# EAGLE board pcb (EAGLE 9.7.0)
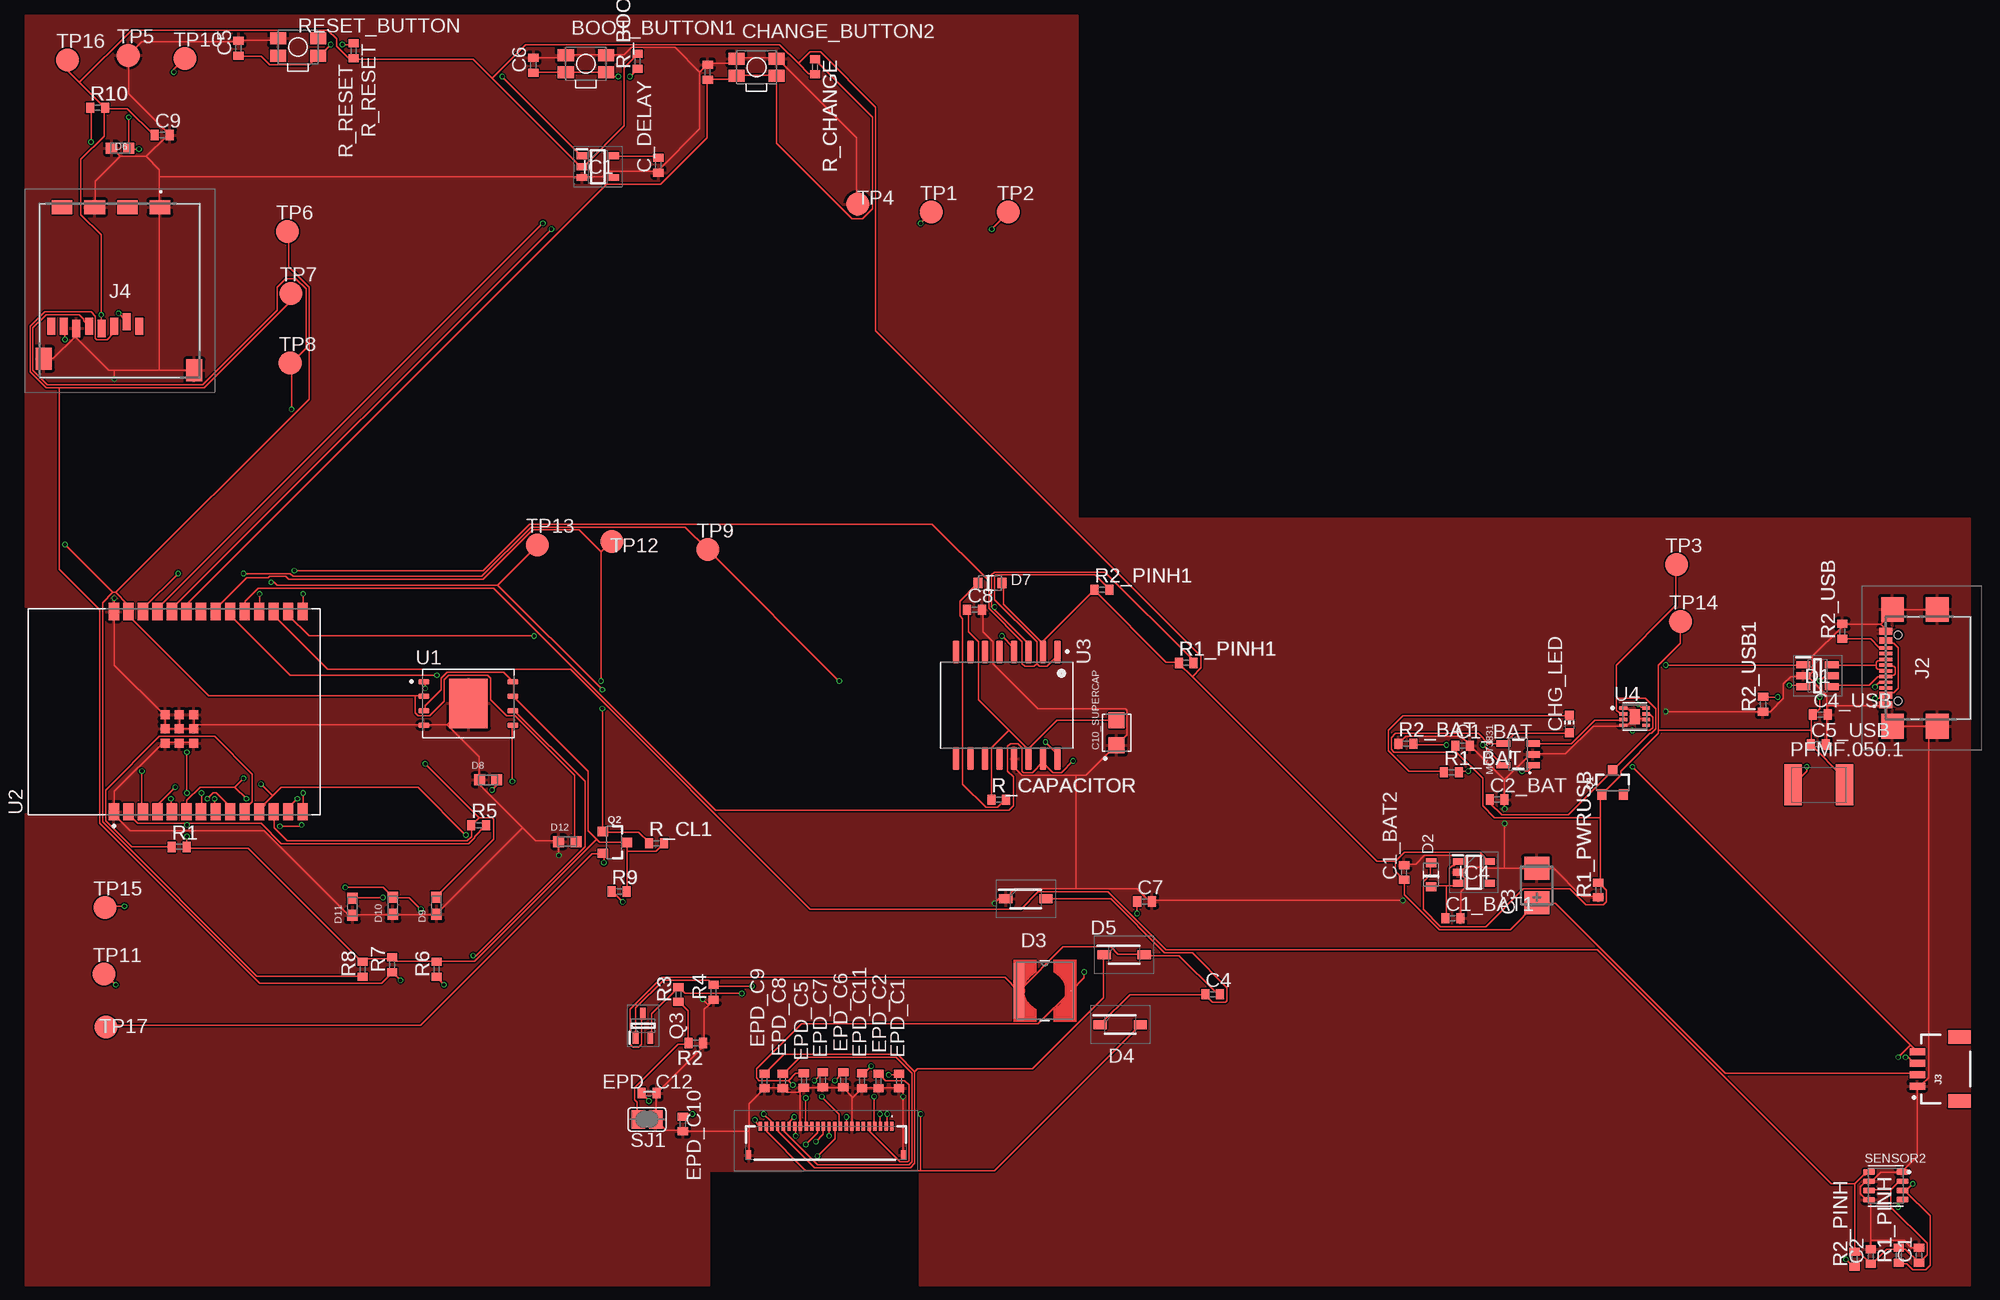
[diagram p0: board, top side]
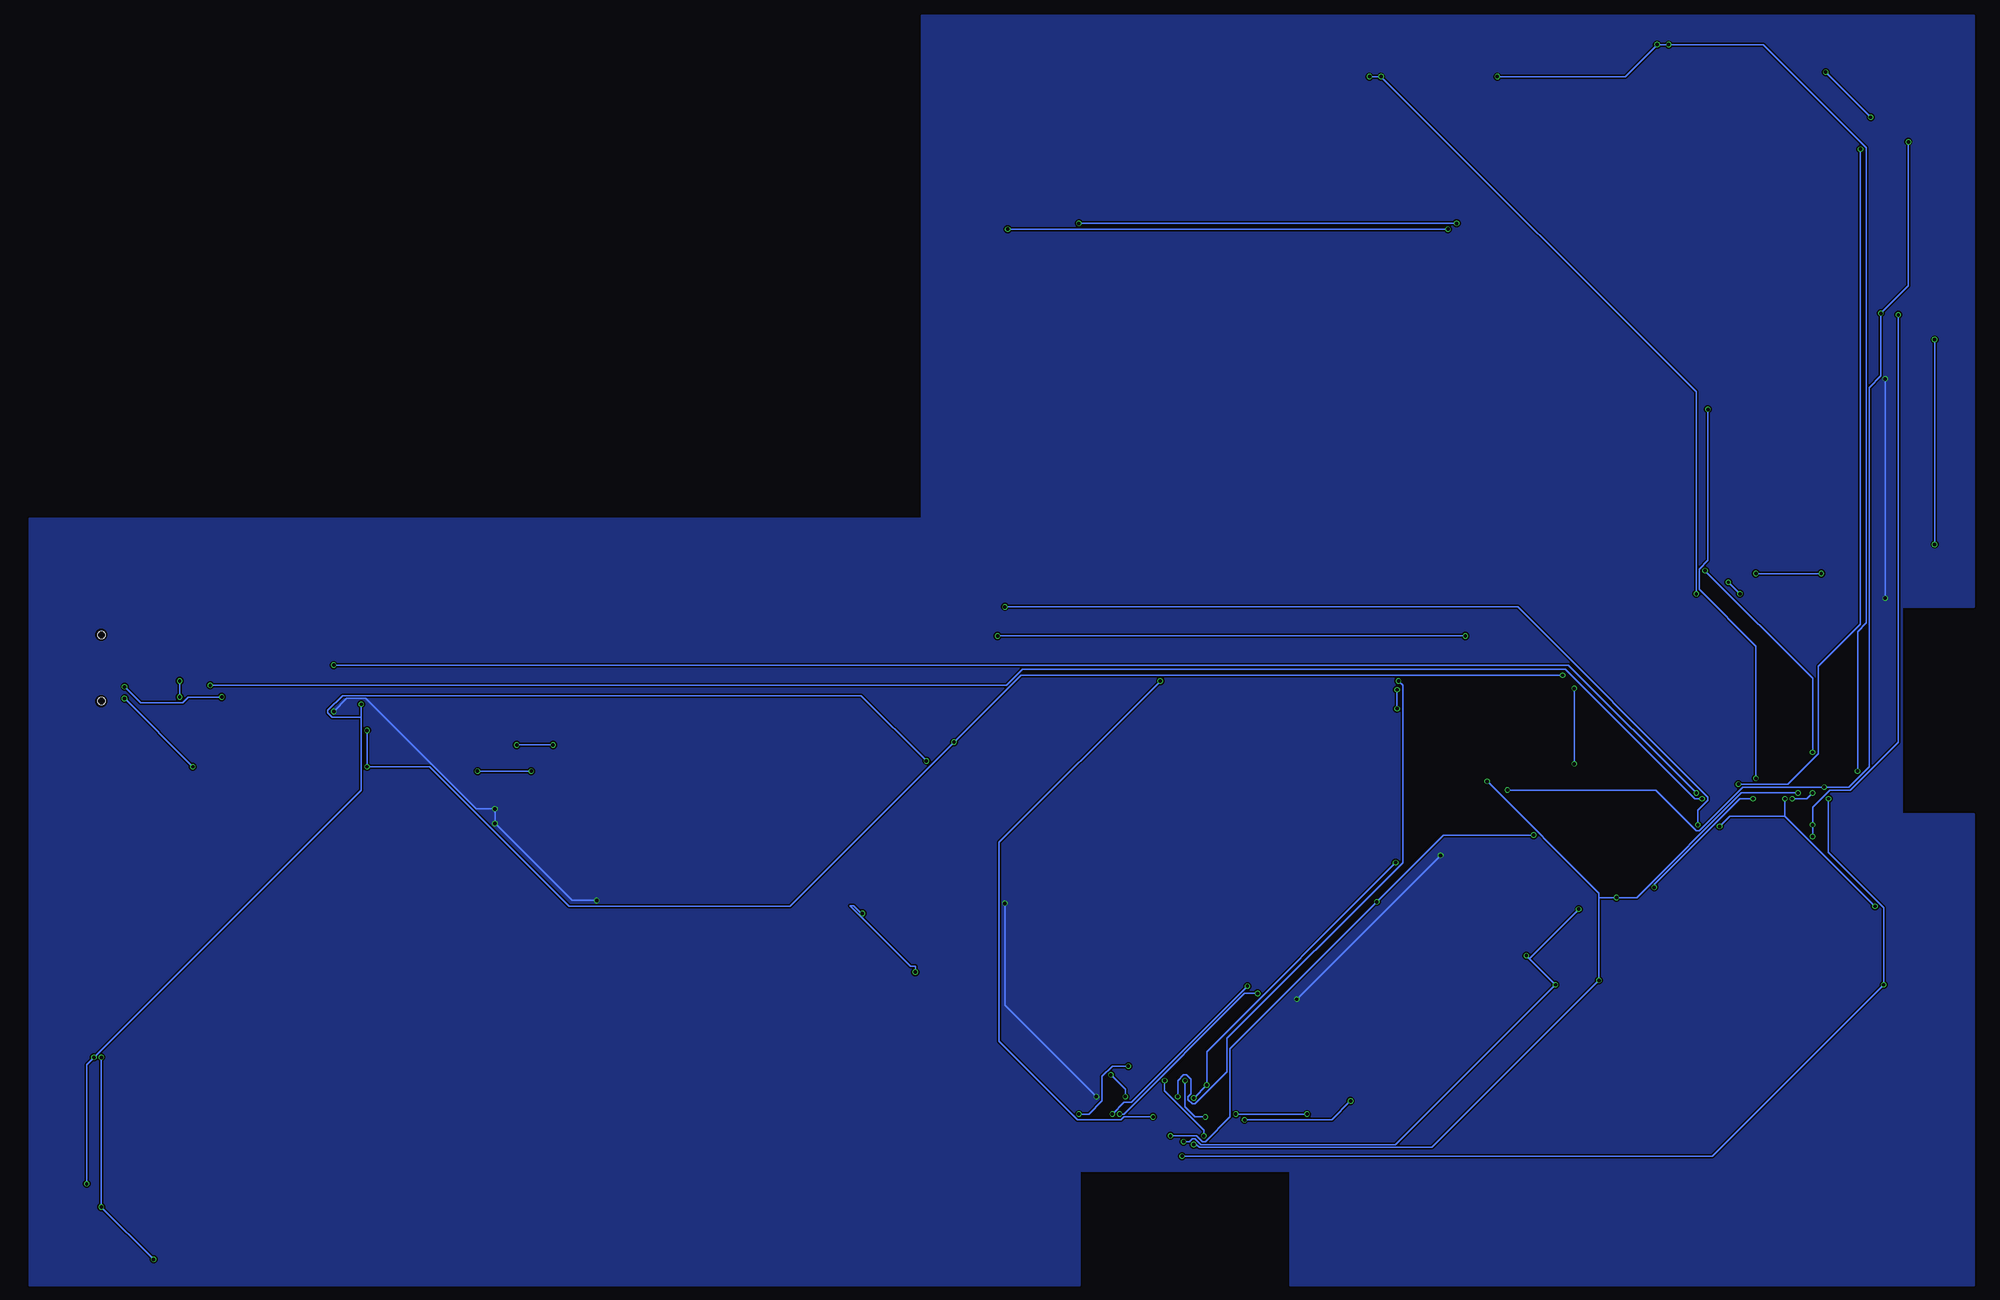
[diagram p1: board, bottom side, seen from below]

No outline drawn. Coordinates in mm, seen from the top.
Copper layers (1*16): Top 0.035mm / dielectric 1.6mm / Bottom 0.035mm
Design rules "jlcpcb-2layers.dru": minimum track width 5mil, minimum drill 0.3mm, track to track 5mil, track to pad 5mil, pad to pad 5mil, via to via 5mil, smd to smd 5mil, copper to edge 0.2mm, drill to drill 6mil, minimum pad ring 10mil, minimum via ring 3mil, stop-mask expansion 4mil, vias tented up to drill 0mil, thermal gap 10mil

## Footprints (pad centres in the part's own frame; a part is rotated, then mirrored left to right if it is on the bottom)
MYBUTTON = smd 1.4 x 1.05: 1 1.75,0.75; 2 -1.75,0.75; 3 -1.75,-0.75; 4 1.75,-0.75
EAGLE-LTSPICE_C0402 = smd 0.7 x 0.9: 1 -0.65,0; 2 0.65,0
RCL_CT3528 = smd 2 x 2.2: + -1.5,0; - 1.5,0
CAPCP3225X100N = smd 1.4 x 1.4: 1 -1.1,0; 2 1.1,0
ADAFRUIT_CHIP-LED0603 = smd 0.8 x 0.8: A 0,-0.75; C 0,0.75
SOT95P280X145-6N = smd 1.2 x 0.6: 1 -1.25,0.95; 2 -1.25,0; 3 -1.25,-0.95; 4 1.25,-0.95; 5 1.25,0; 6 1.25,0.95
ESP32_WROVER_AVX---SD0805S020S1R0_AVX_SD0805S020S1R0_0 = smd 0.8 x 0.9: 1 -1.05,0; 2 1.05,0
SOD3716X135N = smd 1.15 x 0.8: 1 -1.75,0; 2 1.75,0
DIOC1608X36N = smd 0.97 x 0.94: 1 -0.75,0; 2 0.75,0
FH34SRJ24S05SH99 = smd 0.3 x 0.8: 1 5.75,1.45; 2 5.25,1.45; 3 4.75,1.45; 4 4.25,1.45; 5 3.75,1.45; 6 3.25,1.45; 7 2.75,1.45; 8 2.25,1.45; 9 1.75,1.45; 10 1.25,1.45; 11 0.75,1.45; 12 0.25,1.45; 13 -0.25,1.45; 14 -0.75,1.45; 15 -1.25,1.45; 16 -1.75,1.45; 17 -2.25,1.45; 18 -2.75,1.45; 19 -3.25,1.45; 20 -3.75,1.45; 21 -4.25,1.45; 22 -4.75,1.45; 23 -5.25,1.45; 24 -5.75,1.45 | smd 0.4 x 0.8: MP1 6.75,-1.05; MP2 -6.75,-1.05
SOT95P280X125-5N = smd 0.9 x 0.6: 1 -1.4,0.95; 2 -1.4,0; 3 -1.4,-0.95; 4 1.4,-0.95; 5 1.4,0.95
SOT95P280X120-5N = smd 0.9 x 0.6: 1 -1.4,0.95; 2 -1.4,0; 3 -1.4,-0.95; 4 1.4,-0.95; 5 1.4,0.95
SAMACSYS_PARTS_USB4110GFA = smd 0.3 x 1.15: A1 -3.35,3.678; A4 -2.55,3.678; A5 -1.25,3.678; A6 -0.25,3.678; A7 0.25,3.678; A8 1.25,3.678; A9 2.55,3.678; A12 3.35,3.678; B1 3.05,3.678; B4 2.25,3.678; B5 1.75,3.678; B6 0.75,3.678; B7 -0.75,3.678; B8 -1.75,3.678; B9 -2.25,3.678; B12 -3.05,3.678 | smd 2.18 x 2: MP1 -5.11,-0.827; MP2 5.11,-0.827; MP3 -5.11,3.103; MP4 5.11,3.103 | hole 0.65: -2.89,2.603; 2.89,2.603
JST04_1MM_RA = smd 0.6 x 1.35: 1 -1.5,0; 2 -0.5,0; 3 0.5,0; 4 1.5,0 | smd 1.2 x 2: NC1 2.8,-3.675; NC2 -2.8,-3.675
112ATAARR03ATTEND = smd 1.8 x 1.2: G1 10.6,10.4; G2 4.9,10.4; S1 7.75,10.4; S2 2.05,10.4 | smd 1.4 x 1.9: G3 13.6,-3.85; G4 0.45,-2.85 | smd 0.7 x 1.5: P1 8.8,0; P2 7.7,0.4; P3 6.6,0; P4 5.5,-0.2; P5 4.4,0; P6 3.3,-0.2; P7 2.2,0; P8 1.1,0
IND_4828-WE-TPC_WRE = smd 0.889 x 4.826: 1 -2.286,0 | smd 0.127 x 0.127: 2 2.286,0
ESP32_WROVER_SPARKFUN-IC-POWER_SOT23-5 = smd 0.55 x 1.2: 1 -0.95,-1.3; 2 0,-1.3; 3 0.95,-1.3; 4 0.95,1.3; 5 -0.95,1.3
ESP32C6_VARISTOR_CT/CN1812 = smd 1.5 x 3.6: 1 -2.25,0; 2 2.25,0
ESP32_WROVER_SPARKFUN-DISCRETESEMI_SOT23-3 = smd 0.8 x 0.9: 1 -0.95,-1; 2 0.95,-1; 3 0,1.1
SOT65P210X110-3N = smd 1.05 x 0.5: 1 -1.05,0.65; 2 -1.05,-0.65; 3 1.05,0
ESP32_WROVER_EAGLE-LTSPICE_R0402 = smd 0.7 x 0.9: 1 -0.65,0; 2 0.65,0
ESP32_WROVER_BME680_PSON80P300X300X100-8N = smd 1.016 x 0.5: 1 1.458,1.2; 2 1.458,0.4; 3 1.458,-0.4; 4 1.458,-1.2; 5 -1.458,-1.22; 6 -1.458,-0.4; 7 -1.458,0.4; 8 -1.458,1.2
SJ = smd 1.168 x 1.6: 1 -0.762,0; 2 0.762,0
TP20R = smd 2 x 2: TP 0,0
SON127P600X800X80-9N = smd 0.94 x 0.44: 1 -3.895,1.905; 2 -3.895,0.635; 3 -3.895,-0.635; 4 -3.895,-1.905; 5 3.895,-1.905; 6 3.895,-0.635; 7 3.895,0.635; 8 3.895,1.905 | smd 3.4 x 4.3: 9 0,0
XCVR_ESP32-C6-WROOM-1-N8 = smd 1.5 x 0.9: 1 -8.75,5.26; 2 -8.75,3.99; 3 -8.75,2.72; 4 -8.75,1.45; 5 -8.75,0.18; 6 -8.75,-1.09; 7 -8.75,-2.36; 8 -8.75,-3.63; 9 -8.75,-4.9; 10 -8.75,-6.17; 11 -8.75,-7.44; 12 -8.75,-8.71; 13 -8.75,-9.98; 14 -8.75,-11.25; 15 8.75,-11.25; 16 8.75,-9.98; 17 8.75,-8.71; 18 8.75,-7.44; 19 8.75,-6.17; 20 8.75,-4.9; 21 8.75,-3.63; 22 8.75,-2.36; 23 8.75,-1.09; 24 8.75,0.18; 25 8.75,1.45; 26 8.75,2.72; 27 8.75,3.99; 28 8.75,5.26 | smd 0.8 x 0.8: 29_1 -2.755,0.79; 29_2 -1.505,0.79; 29_3 -0.255,0.79; 29_4 -2.755,-0.46; 29_5 -1.505,-0.46; 29_6 -0.255,-0.46; 29_7 -2.755,-1.71; 29_8 -1.505,-1.71; 29_9 -0.255,-1.71
SOIC127P1032X265-16N = smd 2.05 x 0.59: 1 -4.655,4.445; 2 -4.655,3.175; 3 -4.655,1.905; 4 -4.655,0.635; 5 -4.655,-0.635; 6 -4.655,-1.905; 7 -4.655,-3.175; 8 -4.655,-4.445; 9 4.655,-4.445; 10 4.655,-3.175; 11 4.655,-1.905; 12 4.655,-0.635; 13 4.655,0.635; 14 4.655,1.905; 15 4.655,3.175; 16 4.655,4.445
SON50P200X200X80-9N = smd 0.76 x 0.27: 1 -0.985,0.75; 2 -0.985,0.25; 3 -0.985,-0.25; 4 -0.985,-0.75; 5 0.985,-0.75; 6 0.985,-0.25; 7 0.985,0.25; 8 0.985,0.75 | smd 0.9 x 1.3: 9 0,0

## Placement (x,y rotation side)
BOOT_BUTTON1  BUTTON_CUSYOMV1  [MYBUTTON]  49.1,83.67 0 top
C1  100nF  [EAGLE-LTSPICE_C0402]  165.65,-20.48 90 top
C1_BAT  4.7uF  [EAGLE-LTSPICE_C0402]  125.75,24.06 0 top
C1_BAT1  4.7uF  [EAGLE-LTSPICE_C0402]  124.89,8.98 0 top
C1_BAT2  4.7uF  [EAGLE-LTSPICE_C0402]  120.63,12.98 90 top
C2  100nF  [EAGLE-LTSPICE_C0402]  161.43,-20.58 90 top
C2_BAT  4.7uF  [EAGLE-LTSPICE_C0402]  128.76,19.36 0 top
C3  100uF TANT  [RCL_CT3528]  132.23,11.84 90 top
C4  4.7uF/25V  [EAGLE-LTSPICE_C0402]  103.9,2.34 0 top
C4_USB  100nF  [EAGLE-LTSPICE_C0402]  157.03,26.78 0 top
C5  1uF  [EAGLE-LTSPICE_C0402]  18.73,85.02 90 top
C5_USB  4.7uF  [EAGLE-LTSPICE_C0402]  156.84,24.18 0 top
C6  100nF  [EAGLE-LTSPICE_C0402]  44.51,83.54 90 top
C7  10uF  [EAGLE-LTSPICE_C0402]  97.95,10.44 0 top
C8  100nF  [EAGLE-LTSPICE_C0402]  83.09,35.94 0 top
C9  100nF  [EAGLE-LTSPICE_C0402]  12.07,77.44 0 top
C10  100nF  [EAGLE-LTSPICE_C0402]  59.75,82.94 90 top
C10_SUPERCAP  CPH3225A  [CAPCP3225X100N]  95.5,25.2 90 top
C_DELAY  100nF  [EAGLE-LTSPICE_C0402]  55.44,74.8 90 top
CHANGE_BUTTON2  BUTTON_CUSYOMV1  [MYBUTTON]  64.01,83.37 0 top
CHG_LED  [ADAFRUIT_CHIP-LED0603]  135.08,25.95 0 top
D1  USBLC6-2SC6Y  [SOT95P280X145-6N]  156.78,30.18 0 top
D2  ESP32_WROVER_AVX---SD0805S020S1R0_AVX_SD0805S020S1R0_0_0AVX_SD0805S020S1R0_0_0  [ESP32_WROVER_AVX---SD0805S020S1R0_AVX_SD0805S020S1R0_0]  122.99,12.79 90 top
D3  MBR0530  [SOD3716X135N]  87.56,10.68 0 top
D4  MBR0530  [SOD3716X135N]  95.82,-0.31 0 top
D5  MBR0530  [SOD3716X135N]  96.16,5.79 0 top
D6  PGB1010603MR  [DIOC1608X36N]  8.38,76.28 0 top
D7  ESP32_WROVER_AVX---SD0805S020S1R0_AVX_SD0805S020S1R0_0_0AVX_SD0805S020S1R0_0_0  [ESP32_WROVER_AVX---SD0805S020S1R0_AVX_SD0805S020S1R0_0]  84.44,38.29 0 top
D8  PGB1010603MR  [DIOC1608X36N]  40.56,21.08 0 top
D9  PGB1010603MR  [DIOC1608X36N]  36.04,10.08 90 top
D10  PGB1010603MR  [DIOC1608X36N]  32.22,10.08 90 top
D11  PGB1010603MR  [DIOC1608X36N]  28.7,9.98 90 top
D12  PGB1010603MR  [DIOC1608X36N]  47.48,15.68 0 top
EPD_C1  1uF/50V  [EAGLE-LTSPICE_C0402]  76.48,-5.24 90 top
EPD_C2  1uF/50V  [EAGLE-LTSPICE_C0402]  74.69,-5.24 90 top
EPD_C5  0.1uF/50V  [EAGLE-LTSPICE_C0402]  68.16,-5.2 90 top
EPD_C6  1uF/50V  [EAGLE-LTSPICE_C0402]  71.6,-5.14 90 top
EPD_C7  1uF/50V  [EAGLE-LTSPICE_C0402]  69.81,-5.14 90 top
EPD_C8  1uF/50V  [EAGLE-LTSPICE_C0402]  66.32,-5.24 90 top
EPD_C9  1uF/50V  [EAGLE-LTSPICE_C0402]  64.73,-5.24 90 top
EPD_C10  1uF/50V  [EAGLE-LTSPICE_C0402]  57.58,-9 90 top
EPD_C11  1uF/50V  [EAGLE-LTSPICE_C0402]  73.25,-5.22 90 top
EPD_C12  1uF/50V  [EAGLE-LTSPICE_C0402]  54.62,-6.3 180 top
FH34SRJ-24S-0.5SH_99_  FH34SRJ-24S-0.5SH_99_  [FH34SRJ24S05SH99]  70.11,-10.66 0 top
IC1  BD5229G-TR  [SOT95P280X125-5N]  50.15,74.68 0 top
IC4  XC6220A331MR-G  [SOT95P280X120-5N]  126.73,13 0 top
J2  SAMACSYS_PARTS_USB4110-GF-A  [SAMACSYS_PARTS_USB4110GFA]  166.43,30.86 90 top
J3  QWIIC_RIGHT_ANGLE  [JST04_1MM_RA]  165.51,-4.18 90 top
J4  112A-TAAR-R03_ATTEND  [112ATAARR03ATTEND]  1.27,60.73 0 top
L1  68uH  [IND_4828-WE-TPC_WRE]  89.23,2.65 0 top
MCP73831  ESP32_WROVER_SPARKFUN-IC-POWER_MCP73831  [ESP32_WROVER_SPARKFUN-IC-POWER_SOT23-5]  130.61,23.3 90 top
PFMF.050.1  ESP32C6_VARISTORCN1812  [ESP32C6_VARISTOR_CT/CN1812]  156.88,20.64 0 top
Q1  20V/4.2A/52mΩ/1.4W  [ESP32_WROVER_SPARKFUN-DISCRETESEMI_SOT23-3]  138.86,20.81 0 top
Q2  20V/4.2A/52mΩ/1.4W  [ESP32_WROVER_SPARKFUN-DISCRETESEMI_SOT23-3]  51.58,15.61 270 top
Q3  SI1308EDL-T1-GE3  [SOT65P210X110-3N]  54.09,-0.41 90 top
R1  10k  [ESP32_WROVER_EAGLE-LTSPICE_R0402]  13.55,15.22 0 top
R1_BAT  200  [ESP32_WROVER_EAGLE-LTSPICE_R0402]  124.78,21.74 0 top
R1_PINH  10k  [ESP32_WROVER_EAGLE-LTSPICE_R0402]  163.87,-20.48 90 top
R1_PINH1  10k  [ESP32_WROVER_EAGLE-LTSPICE_R0402]  101.58,31.3 0 top
R1_PWRUSB  100k  [ESP32_WROVER_EAGLE-LTSPICE_R0402]  137.6,11.45 90 top
R2  2.2  [ESP32_WROVER_EAGLE-LTSPICE_R0402]  58.71,-1.92 180 top
R2_BAT  2K  [ESP32_WROVER_EAGLE-LTSPICE_R0402]  120.79,24.24 0 top
R2_PINH  10k  [ESP32_WROVER_EAGLE-LTSPICE_R0402]  160.01,-20.82 90 top
R2_PINH1  10k  [ESP32_WROVER_EAGLE-LTSPICE_R0402]  94.22,37.7 0 top
R2_USB  5k1  [ESP32_WROVER_EAGLE-LTSPICE_R0402]  158.94,34.06 90 top
R2_USB1  5k1  [ESP32_WROVER_EAGLE-LTSPICE_R0402]  152.01,27.68 90 top
R3  0.47  [ESP32_WROVER_EAGLE-LTSPICE_R0402]  57.19,2.32 90 top
R4  10k  [ESP32_WROVER_EAGLE-LTSPICE_R0402]  60.27,2.52 90 top
R5  10K  [ESP32_WROVER_EAGLE-LTSPICE_R0402]  39.73,17.12 0 top
R6  10K  [ESP32_WROVER_EAGLE-LTSPICE_R0402]  36.05,4.52 90 top
R7  10K  [ESP32_WROVER_EAGLE-LTSPICE_R0402]  32.17,4.92 90 top
R8  10K  [ESP32_WROVER_EAGLE-LTSPICE_R0402]  29.59,4.52 90 top
R9  10K  [ESP32_WROVER_EAGLE-LTSPICE_R0402]  52.01,11.32 0 top
R10  10K  [ESP32_WROVER_EAGLE-LTSPICE_R0402]  6.41,79.82 0 top
R_BOOT  10K  [ESP32_WROVER_EAGLE-LTSPICE_R0402]  53.62,83.88 90 top
R_CAPACITOR  15  [ESP32_WROVER_EAGLE-LTSPICE_R0402]  85.2,19.35 0 top
R_CHANGE  10K  [ESP32_WROVER_EAGLE-LTSPICE_R0402]  69.14,83.4 270 top
R_CL1  10k  [ESP32_WROVER_EAGLE-LTSPICE_R0402]  55.27,15.54 0 top
R_RESET  10K  [ESP32_WROVER_EAGLE-LTSPICE_R0402]  28.8,84.8 270 top
RESET_BUTTON  BUTTON_CUSYOMV1  [MYBUTTON]  23.93,85.13 0 top
SENSOR2  ESP32_WROVER_BME680_BME680  [ESP32_WROVER_BME680_PSON80P300X300X100-8N]  162.74,-14.4 0 top
SJ1  [SJ]  54.44,-8.6 180 top
TP1  TPTP20R  [TP20R]  79.31,70.7 0 top
TP2  TPTP20R  [TP20R]  86.03,70.7 0 top
TP3  TPTP20R  [TP20R]  144.45,39.9 0 top
TP4  TPTP20R  [TP20R]  72.87,71.4 0 top
TP5  TPTP20R  [TP20R]  9.09,84.4 0 top
TP6  TPTP20R  [TP20R]  23.01,69 0 top
TP7  TPTP20R  [TP20R]  23.33,63.6 0 top
TP8  TPTP20R  [TP20R]  23.25,57.5 0 top
TP9  TPTP20R  [TP20R]  59.77,41.2 0 top
TP10  TPTP20R  [TP20R]  14.04,84.12 0 top
TP11  TPTP20R  [TP20R]  6.99,4.1 0 top
TP12  TPTP20R  [TP20R]  51.39,41.92 0 top
TP13  TPTP20R  [TP20R]  44.84,41.62 0 top
TP14  TPTP20R  [TP20R]  144.79,34.92 0 top
TP15  TPTP20R  [TP20R]  7.04,9.92 0 top
TP16  TPTP20R  [TP20R]  3.79,84 0 top
TP17  TPTP20R  [TP20R]  7.14,-0.5 0 top
U1  W25Q512JVEIQ  [SON127P600X800X80-9N]  38.83,27.76 0 top
U2  ESP32-C6-WROOM-1-N8  [XCVR_ESP32-C6-WROOM-1-N8]  13.1,27.04 90 top
U3  DS3231SN#  [SOIC127P1032X265-16N]  85.89,27.6 270 top
U4  MAX17048G+T10  [SON50P200X200X80-9N]  140.8,26.6 0 top

## Library data of the parts
BOOT_BUTTON1 CHANGE_BUTTON2 CHG_LED PFMF.050.1 RESET_BUTTON SJ1 TP1-TP17 = DeskAssistant v19 v1
C1 C1_BAT C1_BAT1 C1_BAT2 C2 C2_BAT C4 C4_USB C5 C5_USB C6-C10 C_DELAY EPD_C1 EPD_C2 EPD_C5-EPD_C12 = DeskAssistant v19 v1; SPICEMODEL: NONE; SPICEPREFIX: C
C3 = DeskAssistant v19 v1; SPICEPREFIX: C
C10_SUPERCAP = DeskAssistant v19 v1; AVAILABILITY: Not in stock; CHECK_PRICES: https://www.snapeda.com/parts/CPH3225A/Seiko+Instruments/view-part/?ref=eda; DESCRIPTION: 11 mF (EDLC) Supercapacitor 3.3 V 1210 (3225 Metric) - -; MF: Seiko Instruments; MP: CPH3225A; PACKAGE: 1210 Seiko; PRICE: None; PURCHASE-URL: https://www.snapeda.com/api/url_track_click_mouser/?unipart_id=562593&manufacturer=Seiko Instruments&part_name=CPH3225A&search_term=None; SNAPEDA_LINK: https://www.snapeda.com/parts/CPH3225A/Seiko+Instruments/view-part/?ref=snap
D1 = DeskAssistant v19 v1; AVAILABILITY: In Stock; CHECK_PRICES: https://www.snapeda.com/parts/USBLC6-2SC6Y/STMicroelectronics/view-part/?ref=eda; DESCRIPTION: 17V Clamp 5A (8/20µs) Ipp Tvs Diode Surface Mount SOT-23-6; MF: STMicroelectronics; MP: USBLC6-2SC6Y; PACKAGE: SOT-23-6 STMicroelectronics; PRICE: None; SNAPEDA_LINK: https://www.snapeda.com/parts/USBLC6-2SC6Y/STMicroelectronics/view-part/?ref=snap
D2 D7 = DeskAssistant v19 v1; CENTROID_NOT_SPECIFIED: No; DATASHEET: http://datasheets.avx.com/schottky.pdf; DIGIKEY_DESCRIPTION: DIODE SCHOTTKY 20V 1A 0805; DIGIKEY_PART_NUMBER: 478-7800-1-ND; LEAD_FREE: yes; MF: AVX; MOUSER_PART_NUMBER: 581-SD0805S020S1R0; PACKAGE: 0805 (2012 metric); PREFIX: D; ROHS: yes; TEMPERATURE_RANGE_HIGH: +125°C; TEMPERATURE_RANGE_LOW: -55°C
D3-D5 = DeskAssistant v19 v1; AVAILABILITY: In Stock; CHECK_PRICES: https://www.snapeda.com/parts/MBR0530/Onsemi/view-part/?ref=eda; DESCRIPTION: Diode Schottky 30 V 500mA Surface Mount SOD-123; MF: ON Semiconductor; MP: MBR0530; PACKAGE: SOD-123-2 ON Semiconductor; PRICE: None; PURCHASE-URL: https://www.snapeda.com/api/url_track_click_mouser/?unipart_id=179458&manufacturer=ON Semiconductor&part_name=MBR0530&search_term=None; SNAPEDA_LINK: https://www.snapeda.com/parts/MBR0530/Onsemi/view-part/?ref=snap
D6 D8-D12 = DeskAssistant v19 v1; AVAILABILITY: In Stock; CHECK_PRICES: https://www.snapeda.com/parts/PGB1010603MR/Littelfuse/view-part/?ref=eda; DESCRIPTION: 150V (Typ) Clamp - Ipp Tvs Diode Surface Mount 0603 (1608 Metric); MF: Littelfuse Inc.; MP: PGB1010603MR; PACKAGE: 0603 Littelfuse Inc.; PRICE: None; PURCHASE-URL: https://www.snapeda.com/api/url_track_click_mouser/?unipart_id=5659453&manufacturer=Littelfuse Inc.&part_name=PGB1010603MR&search_term=None; SNAPEDA_LINK: https://www.snapeda.com/parts/PGB1010603MR/Littelfuse/view-part/?ref=snap
FH34SRJ-24S-0.5SH_99_ = DeskAssistant v19 v1; DESCRIPTION: 24 Position FFC, FPC Connector Contacts, Top and Bottom 0.020" (0.50mm) Surface Mount, Right Angle; HEIGHT: 1.1mm; MANUFACTURER_NAME: Hirose; MANUFACTURER_PART_NUMBER: FH34SRJ-24S-0.5SH(99); MOUSER_PART_NUMBER: 798-FH34SRJ24S05SH99; MOUSER_PRICE-STOCK: https://www.mouser.co.uk/ProductDetail/Hirose-Connector/FH34SRJ-24S-0.5SH99?qs=vcbW%252B4%252BSTIpKBl5ap9J8Fw%3D%3D
IC1 = DeskAssistant v19 v1; DESCRIPTION: Voltage Detector with Adjustable Delay Time: CMOS processes are utilized to develop high precision, low current consumption CMOS reset ICs that allow arbitrary setting of the delay time. The extensive lineup includes both Nch Open Drain and CMOS output types in a wide range of detection voltages (from 2.3V to 6.0V, in 0.1V steps), enabling selection of the ideal solution based on customer requirements. In addition, the entire series is of course both lead-free and RoHS-compliant.; HEIGHT: 1.25mm; MANUFACTURER_NAME: ROHM Semiconductor; MANUFACTURER_PART_NUMBER: BD5229G-TR; MOUSER_PART_NUMBER: 755-BD5229G-TR; MOUSER_PRICE-STOCK: https://www.mouser.co.uk/ProductDetail/ROHM-Semiconductor/BD5229G-TR?qs=4kLU8WoGk0vvnhrrYwdszw%3D%3D
IC4 = DeskAssistant v19 v1; DESCRIPTION: LDO Voltage Regulators; HEIGHT: 1.2mm; MANUFACTURER_NAME: Torex; MANUFACTURER_PART_NUMBER: XC6220A331MR-G; MOUSER_PART_NUMBER: 865-XC6220A331MR-G; MOUSER_PRICE-STOCK: https://www.mouser.co.uk/ProductDetail/Torex-Semiconductor/XC6220A331MR-G?qs=AsjdqWjXhJ8ZSWznL1J0gg%3D%3D
J2 = DeskAssistant v19 v1; DESCRIPTION: CONN USB 2.0 TYPE-C R/A SMT; HEIGHT: 3.26mm; MANUFACTURER_NAME: GCT (GLOBAL CONNECTOR TECHNOLOGY); MANUFACTURER_PART_NUMBER: USB4110-GF-A; MOUSER_PART_NUMBER: 640-USB4110-GF-A; MOUSER_PRICE-STOCK: https://www.mouser.co.uk/ProductDetail/GCT/USB4110-GF-A?qs=KUoIvG%2F9IlYiZvIXQjyJeA%3D%3D
J3 = DeskAssistant v19 v1; PROD_ID: CONN-13694
J4 = DeskAssistant v19 v1; DESCRIPTION: Micro SD Card Socket, Push-Push Type, Top Mount, SMT, H=1.83mm, 10u; HEIGHT: 1.9mm; MANUFACTURER_NAME: ATTEND; MANUFACTURER_PART_NUMBER: 112A-TAAR-R03 ATTEND
L1 = DeskAssistant v19 v1; COPYRIGHT: Copyright (C) 2024 Ultra Librarian. All rights reserved.; MANUFACTURER_PART_NUMBER: 744043680; MFR_NAME: Wurth Electronics
MCP73831 = DeskAssistant v19 v1; PROD_ID: IC-09995
Q1 Q2 = DeskAssistant v19 v1; PROD_ID: TRAN-14388
Q3 = DeskAssistant v19 v1; AVAILABILITY: In Stock; CHECK_PRICES: https://www.snapeda.com/parts/SI1308EDL-T1-GE3/Vishay+Siliconix/view-part/?ref=eda; DESCRIPTION: Si1308EDL-T1-GE3 N-channel MOSFET Transistor, 1.5 A, 30 V, 3-Pin SC-70 | Siliconix / Vishay SI1308EDL-T1-GE3; MF: Vishay Siliconix; MP: SI1308EDL-T1-GE3; PACKAGE: SOT-323 Vishay Semiconductor; PRICE: None; PURCHASE-URL: https://www.snapeda.com/api/url_track_click_mouser/?unipart_id=274603&manufacturer=Vishay Siliconix&part_name=SI1308EDL-T1-GE3&search_term=None; SNAPEDA_LINK: https://www.snapeda.com/parts/SI1308EDL-T1-GE3/Vishay+Siliconix/view-part/?ref=snap
R1 R1_BAT R1_PINH R1_PINH1 R1_PWRUSB R2 R2_BAT R2_PINH R2_PINH1 R2_USB R2_USB1 R3-R10 R_BOOT R_CAPACITOR R_CHANGE R_CL1 R_RESET = DeskAssistant v19 v1; SPICEMODEL: NONE; SPICEPREFIX: R
SENSOR2 = DeskAssistant v19 v1; AVAILABILITY: Unavailable; DESCRIPTION: Integrated Environmental Unit; MF: Bosch Sensortec; MP: BME680; PACKAGE: LGA-8 Bosch Tools; PRICE: None
U1 = DeskAssistant v19 v1; AVAILABILITY: In Stock; CHECK_PRICES: https://www.snapeda.com/parts/W25Q512JVEIQ/Winbond+Electronics/view-part/?ref=eda; DESCRIPTION: FLASH - NOR Memory IC 512Mb (64M x 8) SPI - Quad I/O 133 MHz 8-WSON (8x6); MF: Winbond Electronics; MP: W25Q512JVEIQ; PACKAGE: Package; PRICE: None; SNAPEDA_LINK: https://www.snapeda.com/parts/W25Q512JVEIQ/Winbond+Electronics/view-part/?ref=snap
U2 = DeskAssistant v19 v1; AVAILABILITY: In Stock; CHECK_PRICES: https://www.snapeda.com/parts/ESP32-C6-WROOM-1-N8/Espressif+Systems/view-part/?ref=eda; DESCRIPTION: Multiprotocol Modules ESP32-C6 module, Wi-Fi 6 in 2.4 GHz band, Bluetooth 5, Zigbee 3.0 and Thread. ESP34-WROOM Compatible - ENGINEERING SAMPLE; MF: Espressif Systems; MP: ESP32-C6-WROOM-1-N8; PACKAGE: None; PRICE: None; SNAPEDA_LINK: https://www.snapeda.com/parts/ESP32-C6-WROOM-1-N8/Espressif+Systems/view-part/?ref=snap
U3 = DeskAssistant v19 v1; AVAILABILITY: In Stock; CHECK_PRICES: https://www.snapeda.com/parts/DS3231SN%23/Analog+Devices/view-part/?ref=eda; DESCRIPTION: Extremely Accurate I²C-Integrated RTC/TCXO/Crystal; MF: Analog Devices; MP: DS3231SN#; PACKAGE: SOIC-16 Maxim; PRICE: None; PURCHASE-URL: https://www.snapeda.com/api/url_track_click_mouser/?unipart_id=99048&manufacturer=Analog Devices&part_name=DS3231SN#&search_term=None; SNAPEDA_LINK: https://www.snapeda.com/parts/DS3231SN%23/Analog+Devices/view-part/?ref=snap
U4 = DeskAssistant v19 v1; AVAILABILITY: In Stock; CHECK_PRICES: https://www.snapeda.com/parts/MAX17048G+T10/Analog+Devices/view-part/?ref=eda; DESCRIPTION: 3µA 1-Cell/2-Cell Fuel Gauge with ModelGauge; MF: Analog Devices; MP: MAX17048G+T10; PACKAGE: TDFN-8 Maxim; PRICE: None; PURCHASE-URL: https://www.snapeda.com/api/url_track_click_mouser/?unipart_id=329239&manufacturer=Analog Devices&part_name=MAX17048G+T10&search_term=None; SNAPEDA_LINK: https://www.snapeda.com/parts/MAX17048G+T10/Analog+Devices/view-part/?ref=snap

## Nets
3V3: C1_BAT2.1 C3.+ C9.1 D7.2 IC1.2 IC4.5 J3.2 J4.P4 Q2.3 R1.2 R1_PINH1.1 R2_PINH1.1 R5.2 R6.2 R7.2 R8.2 R9.2 R10.2 R_BOOT.2 R_CHANGE.2 R_CL1.2 R_RESET.2 TP16.TP U1.3 U1.7 U1.8 U2.2 U3.2
32KHZ: R2_PINH1.2 U2.9 U3.1
DN: D1.4 J2.A7 J2.B7
DP: D1.6 J2.A6 J2.B6
EPD_3V3: C7.1 EPD_C5.2 FH34SRJ-24S-0.5SH_99_.15 FH34SRJ-24S-0.5SH_99_.16 L1.2 Q2.2 TP17.TP
EPD_3V3_C: Q2.1 R_CL1.1 TP13.TP U2.18
EPD_BUSY: FH34SRJ-24S-0.5SH_99_.9 TP9.TP U2.26
EPD_CS: D6.2 FH34SRJ-24S-0.5SH_99_.12 R9.1 TP10.TP U2.11
EPD_DC: FH34SRJ-24S-0.5SH_99_.11 TP11.TP U2.5
EPD_RST: FH34SRJ-24S-0.5SH_99_.10 TP12.TP U2.21
FLASH_CS: D9.2 R5.1 U1.1 U2.12
GDR: FH34SRJ-24S-0.5SH_99_.2 Q3.1 R4.2
GND: BOOT_BUTTON1.1 BOOT_BUTTON1.2 C1.2 C1_BAT1.2 C1_BAT2.2 C1_BAT.2 C2.2 C2_BAT.2 C3.- C4_USB.2 C5.2 C5_USB.2 C6.2 C7.2 C8.2 C9.2 C10.2 C10_SUPERCAP.1 C_DELAY.1 CHANGE_BUTTON2.1 CHANGE_BUTTON2.2 D1.2 D3.1 D6.1 D8.1 D9.1 D10.1 D11.1 D12.1 EPD_C1.1 EPD_C2.1 EPD_C5.1 EPD_C6.1 EPD_C7.1 EPD_C8.1 EPD_C9.1 EPD_C10.1 EPD_C11.1 EPD_C12.1 FH34SRJ-24S-0.5SH_99_.8 FH34SRJ-24S-0.5SH_99_.17 FH34SRJ-24S-0.5SH_99_.MP1 FH34SRJ-24S-0.5SH_99_.MP2 IC1.3 IC4.2 J2.A1 J2.A12 J2.B1 J2.B12 J2.MP1 J2.MP2 J2.MP3 J2.MP4 J3.1 J4.G1 J4.G2 J4.G3 J4.G4 J4.P6 MCP73831.2 R1_PWRUSB.1 R2.1 R2_BAT.1 R2_USB1.1 R2_USB.2 R4.1 RESET_BUTTON.2 SENSOR2.1 SENSOR2.5 SENSOR2.7 SJ1.1 TP4.TP TP5.TP U1.4 U1.9 U2.1 U2.28 U2.29_1 U2.29_2 U2.29_3 U2.29_4 U2.29_5 U2.29_6 U2.29_7 U2.29_8 U2.29_9 U3.13 U4.1 U4.4 U4.6 U4.9
GPIO8: R1.1 U2.10
I2C_PW: C1.1 C2.1 R1_PINH.2 R2_PINH.2 SENSOR2.2 SENSOR2.6 SENSOR2.8 U2.17
INT_RTC: R1_PINH1.2 TP15.TP U2.8 U3.3
IO/BOOT: BOOT_BUTTON1.3 BOOT_BUTTON1.4 C6.1 R_BOOT.1 U2.15
IO/CHANGE: C10.1 CHANGE_BUTTON2.3 CHANGE_BUTTON2.4 R_CHANGE.1 U2.23
MISO: D12.2 J4.P7 R8.1 TP6.TP U1.2 U2.27
MOSI: D11.2 FH34SRJ-24S-0.5SH_99_.14 J4.P3 R7.1 TP7.TP U1.5 U2.7
N$1: J2.A5 R2_USB1.2
N$2: J2.B5 R2_USB.1
N$3: D7.1 R_CAPACITOR.2
N$5: MCP73831.1 R1_BAT.2
N$8: C4.1 D3.2 D4.1
N$9: CHG_LED.C R1_BAT.1
N$10: MCP73831.5 R2_BAT.2
N$11: EPD_C12.2 FH34SRJ-24S-0.5SH_99_.24
N$13: EPD_C8.2 FH34SRJ-24S-0.5SH_99_.20
N$14: EPD_C10.2 FH34SRJ-24S-0.5SH_99_.22
N$15: EPD_C7.2 FH34SRJ-24S-0.5SH_99_.19
N$16: EPD_C6.2 FH34SRJ-24S-0.5SH_99_.18
N$17: EPD_C2.2 FH34SRJ-24S-0.5SH_99_.5
N$18: EPD_C1.2 FH34SRJ-24S-0.5SH_99_.4
N$19: C_DELAY.2 IC1.5
N$20: C1_BAT1.1 D2.1 IC4.1 IC4.3
PREVGH: D5.1 EPD_C9.2 FH34SRJ-24S-0.5SH_99_.21
PREVGL: D4.2 EPD_C11.2 FH34SRJ-24S-0.5SH_99_.23
RESE: FH34SRJ-24S-0.5SH_99_.3 Q3.2 R3.2
RESE': R2.2 R3.1 SJ1.2
RESET: C5.1 IC1.1 R_RESET.1 RESET_BUTTON.4 U2.3
RTC_RST: U2.16 U3.4
RX: TP2.TP U2.24
SCK: D10.2 FH34SRJ-24S-0.5SH_99_.13 J4.P5 R6.1 TP8.TP U1.6 U2.6
SCL: J3.4 R2_PINH.1 SENSOR2.4 U2.20 U3.16 U4.7
SDA: J3.3 R1_PINH.1 SENSOR2.3 U2.19 U3.15 U4.8
SRC: C4.2 D5.2 L1.1 Q3.3
SS_SD: D8.2 J4.P2 R10.1 U2.4
TX: TP1.TP U2.25
USB_D+: D1.1 U2.14
USB_D-: D1.3 U2.13
VBAT: C2_BAT.1 MCP73831.3 Q1.3 TP3.TP U4.2 U4.3
VBUS: C1_BAT.1 C4_USB.1 C5_USB.1 CHG_LED.A D1.5 D2.2 MCP73831.4 PFMF.050.1.2 Q1.1 R1_PWRUSB.2 TP14.TP
VRTC: C8.1 C10_SUPERCAP.2 R_CAPACITOR.1 U3.14
VUSB: J2.A4 J2.A9 J2.B4 J2.B9 PFMF.050.1.1

## Tracks (layer width: path | path; a pad name or v marks a point on that pad's centre or on a via)
3V3  (via drill 0.3)
  Top 0.127: 88.9,33.15 89.03,33.02 89.03,32.26 U3.2 88.9,33.15 | 88.9,33.15 85.6,36.45 85.6,38.23 D7.2 | 88.9,33.15 89.03,33.15 93.47,37.59 R2_PINH1.1 93.6,37.59 99.82,31.37 100.84,31.37 R1_PINH1.1 100.97,31.24 102.11,30.1 | 119.89,13.97 119.89,13.08 120.52,12.45 C1_BAT2.1 120.65,12.32 120.65,11.05 123.7,8 129.92,8 132.21,10.29 C3.+ 132.33,10.29 133.86,10.29 148.72,-4.57 165.48,-4.57 J3.2 | 119.89,13.97 120.65,14.73 127.25,14.73 128.02,13.97 IC4.5 | 102.11,30.1 118.24,13.97 119.89,13.97 | 14.22,17.27 9.91,17.27 9.14,18.03 9.14,18.29 U2.2 | 14.22,17.27 20.7,17.27 22.48,15.49 38.86,15.49 39.37,16 39.37,16.13 40.26,17.02 R5.2 | 52.7,14.86 52.7,15.49 Q2.3 52.58,15.62 50.29,15.62 50.04,15.88 | 52.7,14.86 52.7,11.43 R9.2 | 52.7,14.86 55.24,14.86 55.88,15.49 R_CL1.2 | U1.3 35.05,27.18 35.05,27.56 36.45,28.96 36.45,29.97 36.96,30.48 41.91,30.48 U1.8 42.8,29.59 42.8,28.45 U1.7 49.28,21.84 49.28,16.64 50.04,15.88 | 50.04,15.88 39.37,5.21 36.07,5.21 R6.2 35.94,5.21 32.51,5.21 32.26,5.46 R7.2 32.13,5.46 29.84,5.46 29.59,5.21 R8.2 29.46,5.21 19.56,15.11 14.22,15.11 R1.2 14.22,15.24 v14.22,16.13 | v14.22,17.14 14.22,17.27 | C9.1 11.3,77.47 9.02,79.76 7.11,79.76 R10.2 | J4.P4 6.73,60.58 v6.73,61.72 6.73,68.71 4.95,70.48 4.95,75.31 6.99,77.34 6.99,79.76 R10.2 | 4.83,82.04 6.99,79.88 R10.2 | 4.83,82.04 3.81,83.06 3.81,83.95 TP16.TP | 40.89,82.42 48.64,74.68 IC1.2 48.77,74.8 49.02,74.8 52.45,78.23 52.45,83.31 53.59,84.45 R_BOOT.2 | 40.89,82.42 39.24,84.07 28.83,84.07 R_RESET.2 28.7,84.2 28.32,84.2 27.3,85.22 27.3,85.85 26.54,86.61 9.4,86.61 4.83,82.04 | 67.69,83.69 66.04,85.34 43.81,85.34 40.89,82.42
  Top 0.127: 67.69,83.69 68.58,82.8 69.09,82.8 R_CHANGE.2 | 102.11,30.1 102.87,30.86 102.87,31.89 74.42,60.34 74.42,79.88 69.6,84.71 68.71,84.71 67.69,83.69
  Bottom 0.127: v14.22,16.13 v14.22,17.14 14.22,18.67 12.7,20.19 10.92,20.19 6.73,24.38 v6.73,61.72
32KHZ  (via drill 0.3)
  Top 0.127: 88.52,31.24 88.52,33.15 84.84,36.83 84.84,38.86 84.96,38.99 93.6,38.99 94.87,37.72 R2_PINH1.2 | 88.52,31.24 88.77,30.99 89.41,30.99 90.3,31.88 90.3,32.13 U3.1 | v16,19.43 16.51,19.94 16.76,19.94 17.91,18.8 17.91,18.41 U2.9 | v14.22,23.5 v14.22,19.94 | v23.62,39.37 40.13,39.37 44.2,43.43 79.38,43.43 84.33,38.48 84.33,36.07 87.25,33.15 87.25,31.24 87.5,30.99 88.27,30.99 88.52,31.24
  Bottom 0.127: v16,19.43 14.73,19.43 v14.22,19.94 | v14.22,23.5 14.22,29.97 v23.62,39.37
DN
  Top 0.127: J2.A7 162.81,30.99 163.45,30.99 163.58,30.86 163.58,30.35 163.45,30.23 162.81,30.23 J2.B7 162.69,30.1 162.05,30.1 161.29,29.34 158.12,29.34 D1.4
DP
  Top 0.127: 161.93,31.11 161.93,31.37 162.05,31.5 162.69,31.5 J2.B6 | 161.93,31.11 161.93,30.86 162.05,30.73 162.69,30.73 J2.A6 | 161.93,31.11 158.12,31.11 D1.6
EPD_3V3  (via drill 0.3)
  Top 0.127: FH34SRJ-24S-0.5SH_99_.15 68.83,-9.14 68.45,-9.14 FH34SRJ-24S-0.5SH_99_.16 68.33,-9.14 v68.33,-6.73 | 66.8,-5.21 67.44,-4.57 68.07,-4.57 EPD_C5.2 | 66.8,-5.21 64.26,-5.21 64.01,-4.95 64.01,-4.19 67.94,-0.25 88.65,-0.25 91.57,2.67 | 91.57,2.67 92.67,3.77 v92.67,4.28 | v97.28,9.4 97.28,10.41 C7.1 | 91.57,2.67 L1.2 | 66.8,-5.21 v67.18,-5.59 | TP17.TP 7.24,-0.38 34.67,-0.38 49.66,14.61 50.55,14.61 Q2.2 50.67,14.61 v50.67,13.84
  Bottom 0.127: v92.67,4.28 92.67,4.78 93.07,4.78 98.38,10.1 98.08,10.1 97.38,9.4 v97.28,9.4 | v68.33,-6.73 v67.18,-5.59 67.18,-2.67 v50.67,13.84
EPD_3V3_C  (via drill 0.3)
  Top 0.127: R_CL1.1 54.61,15.62 53.72,16.51 50.67,16.51 Q2.1 50.55,16.64 v50.55,27.3 | v20.57,37.34 20.57,35.81 U2.18 | v21.59,38.35 21.84,38.35 22.1,38.1 41.4,38.1 | 41.4,38.1 44.83,41.53 TP13.TP | 41.4,38.1 v50.55,28.96
  Bottom 0.127: v21.59,38.35 v20.57,37.34 | v50.55,28.96 v50.55,27.3
EPD_BUSY  (via drill 0.3)
  Top 0.127: v71.88,-8.38 71.88,-9.14 FH34SRJ-24S-0.5SH_99_.9 | v71.25,29.72 59.82,41.15 TP9.TP 59.69,41.27 57.78,43.18 44.32,43.18 40.01,38.86 23.5,38.86 23.24,39.12 v19.18,39.12 | v13.46,39.12 10.41,36.07 10.41,35.81 U2.26
  Bottom 0.127: v71.88,-8.38 74.42,-8.38 74.68,-8.64 78.49,-8.64 85.34,-1.78 85.34,15.62 v71.25,29.72 | v19.18,39.12 v13.46,39.12
EPD_CS  (via drill 0.3)
  Top 0.127: v9.14,78.99 9.14,76.33 D6.2 9.14,76.2 v10.03,76.2 | v13.08,82.93 13.08,83.19 13.97,84.07 TP10.TP | v70.36,-10.03 70.36,-9.27 FH34SRJ-24S-0.5SH_99_.12 | v52.32,10.41 51.44,11.3 R9.1 | 21.72,19.68 22.48,20.45 34.42,20.45 v38.61,16.26 | 21.72,19.68 21.08,19.05 21.08,18.92 20.57,18.41 U2.11 | 21.72,19.68 v20.7,20.7
  Bottom 0.127: v13.08,82.93 v9.14,78.99 | v70.36,-10.03 68.07,-10.03 67.56,-10.54 67.31,-10.54 65.15,-8.38 65.15,-2.41 v52.32,10.41 46.48,16.26 v38.61,16.26 | v10.03,76.2 10.03,34.67 13.72,30.99 13.72,23.37 16.38,20.7 v20.7,20.7
EPD_DC  (via drill 0.3)
  Top 0.127: v69.34,-11.81 70.87,-10.29 70.87,-9.27 FH34SRJ-24S-0.5SH_99_.11 | v8,3.17 7.11,4.06 TP11.TP | v12.83,19.43 12.83,18.41 U2.5
  Bottom 0.127: v69.34,-11.81 22.99,-11.81 v8,3.17 8,9.91 12.83,14.73 v12.83,19.43
EPD_RST  (via drill 0.3)
  Top 0.127: v69.72,-6.6 71.25,-8.13 71.25,-9.14 FH34SRJ-24S-0.5SH_99_.10 | 50.42,41.02 v50.42,29.72 | 50.42,41.02 51.31,41.91 TP12.TP | 50.42,41.02 48.51,42.93 44.45,42.93 40.13,38.61 23.11,38.61 22.86,38.86 21.46,38.86 21.34,38.73 19.43,38.73 16.76,36.07 16.76,35.81 U2.21
  Bottom 0.127: v69.72,-6.6 69.72,-5.21 69.22,-4.7 68.96,-4.7 68.58,-5.08 68.58,-6.35 68.83,-6.6 68.83,-6.86 68.45,-7.24 68.2,-7.24 65.41,-4.45 65.41,-1.52 50.04,13.84 50.04,29.34 v50.42,29.72
FLASH_CS  (via drill 0.3)
  Top 0.127: 39.75,17.78 39.12,17.14 R5.1 39.12,17.02 39.12,16.13 38.73,15.75 22.99,15.75 21.84,16.89 21.84,18.29 U2.12 | 39.75,17.78 40.89,17.78 41.02,17.65 41.02,15.88 36.07,10.92 D9.2 | v35.05,29.08 35.05,29.59 U1.1 | 39.75,17.78 v35.05,22.48
  Bottom 0.127: v35.05,22.48 v35.05,29.08
GDR  (via drill 0.3)
  Top 0.127: v75.44,-8.13 75.44,-9.14 FH34SRJ-24S-0.5SH_99_.2 | v63.63,3.05 60.33,3.05 R4.2 60.2,3.17 59.82,3.56 55.88,3.56 53.47,1.14 53.47,-1.4 Q3.1
  Bottom 0.127: v75.44,-8.13 74.42,-7.11 73.79,-7.11 v63.63,3.05
GND  (via drill 0.3)
  Top 0.127: 91.95,11.56 86.61,11.56 85.85,10.79 D3.1 85.72,10.67 85.22,10.67 v84.84,10.29 | 91.95,11.56 97.28,11.56 98.3,10.54 98.55,10.54 C7.2 98.68,10.54 v120.52,10.54 | C8.2 83.82,35.81 83.82,34.04 84.71,33.15 84.71,31.24 88.65,27.3 96.27,27.3 96.39,27.18 96.39,25.02 95.5,24.13 C10_SUPERCAP.1 95.38,24 92.84,21.46 91.95,21.46 | 91.95,21.46 87.25,21.46 86.61,22.1 86.61,22.86 U3.13 | 91.95,21.46 91.95,11.56 | 125.48,12.95 125.35,13.08 IC4.2 125.48,12.95 | 125.48,12.95 125.98,12.45 125.98,11.68 125.6,11.3 125.6,9.02 C1_BAT1.2 | 125.98,13.46 125.98,14.35 125.86,14.48 122.43,14.48 121.67,13.72 120.65,13.72 C1_BAT2.2 | 125.48,12.95 125.98,13.46 | R1_PWRUSB.1 137.54,10.92 136.14,10.92 133.73,13.34 132.33,13.34 C3.- 132.21,13.34 129.41,13.34 | 125.98,13.46 127.51,13.46 127.64,13.34 129.41,13.34 | 140.72,26.42 140.84,26.54 U4.9 | 140.72,26.42 140.21,25.91 139.83,25.91 U4.4 139.7,25.78 137.16,25.78 134.75,23.37 131.95,23.37 MCP73831.2 131.83,23.24 131.57,23.24 129.41,21.08 | U4.1 139.83,27.3 140.21,27.3 140.84,26.67 U4.9 | 140.72,26.42 141.73,26.42 U4.6 | 140.72,26.42 U4.9 | 129.41,21.08 129.41,19.43 C2_BAT.2 129.41,19.3 v129.41,18.54 | 129.41,21.08 126.49,24 C1_BAT.2 126.36,24.13 125.6,24.89 120.78,24.89 120.14,24.26 R2_BAT.1 | v129.41,17.27 129.41,13.34 | 161.42,-19.18 161.42,-15.75 SENSOR2.5 161.16,-15.49 160.91,-15.49 160.53,-15.11 160.53,-14.48 160.91,-14.1 161.16,-14.1 SENSOR2.7 161.29,-13.97 161.54,-13.97 162.31,-13.21 164.08,-13.21 SENSOR2.1 164.21,-13.08 165.48,-11.81 165.48,-5.71 J3.1 165.61,-5.59 165.86,-5.59 166.5,-4.95 166.5,25.78 | 161.42,-19.18 161.42,-19.81 C2.2
  Top 0.127: 161.42,-19.18 164.34,-19.18 164.97,-19.81 165.61,-19.81 C1.2 | 162.31,34.67 159,34.67 R2_USB.2 158.88,34.67 158.88,34.42 156.34,31.88 156.34,30.48 155.96,30.1 | 162.31,34.67 162.69,34.29 J2.A12 162.81,34.16 162.81,34.04 J2.B1 | 162.31,34.67 163.32,35.69 163.32,35.94 J2.MP4 163.45,35.94 167.13,35.94 J2.MP2 | J2.A1 162.81,27.56 162.81,27.69 J2.B12 | J2.A1 162.81,27.43 162.81,26.29 163.32,25.78 J2.MP3 163.45,25.78 166.5,25.78 | 166.5,25.78 167.13,25.78 J2.MP1 166.5,25.78 | C5_USB.2 157.61,24.26 157.61,26.67 C4_USB.2 157.61,26.8 157.61,27.56 | D1.2 155.45,30.1 154.43,30.1 153.8,29.46 153.8,28.19 152.65,27.05 152.02,27.05 R2_USB1.1 151.89,27.05 v143.51,27.05 | 157.61,27.56 157.61,28.45 155.96,30.1 | 155.96,30.1 155.57,30.1 D1.2 | 157.61,27.56 162.69,27.56 J2.A1 | 155.96,30.1 D1.2 | C6.2 44.58,84.2 47.12,84.2 47.24,84.33 BOOT_BUTTON1.2 47.37,84.45 50.8,84.45 BOOT_BUTTON1.1 50.93,84.45 52.45,84.45 53.09,85.09 56.9,85.09 59.05,82.93 | TP4.TP 72.77,71.5 72.77,77.22 65.79,84.2 CHANGE_BUTTON2.1 65.66,84.2 62.36,84.2 CHANGE_BUTTON2.2 62.23,84.07 61.85,83.69 59.82,83.69 C10.2 59.69,83.57 59.05,82.93 | 59.05,82.93 59.05,77.98 55.5,74.42 55.5,74.17 C_DELAY.1 55.37,74.17 55.24,74.3 51.05,74.3 50.55,73.79 48.77,73.79 IC1.3 48.64,73.79 11.81,73.79 | 4.45,59.82 4.45,60.45 J4.P6 4.45,59.82 | 4.45,59.82 2.54,57.91 1.78,57.91 J4.G4 | 7.87,56.9 7.37,56.9 4.45,59.82 | 7.87,56.9 11.81,56.9 | 11.81,56.9 14.86,56.9 J4.G3 | RESET_BUTTON.2 22.1,85.85 21.97,85.72 18.8,85.72 C5.2 18.67,85.6 10.29,85.6 9.14,84.45 TP5.TP 9.14,84.33 9.14,81.03 12.7,77.47 C9.2 12.7,77.34 12.45,77.34 10.67,75.56
  Top 0.127: 8.38,75.56 10.67,75.56 | 8.38,75.56 7.75,76.2 D6.1 | 8.38,75.56 6.22,73.41 6.22,71.25 J4.G2 | 11.81,73.79 11.81,74.42 10.67,75.56 | 11.81,73.79 11.81,71.25 J4.G1 11.81,71.12 11.81,56.9 | 59.82,1.4 60.2,1.78 R4.1 | 59.82,1.4 59.44,1.02 59.44,-1.91 R2.1 59.31,-2.03 59.31,-2.29 55.37,-6.22 EPD_C12.1 55.24,-6.35 55.24,-8.51 SJ1.1 55.24,-8.64 56.13,-9.53 57.53,-9.53 EPD_C10.1 57.66,-9.65 63.37,-9.65 | FH34SRJ-24S-0.5SH_99_.MP1 76.83,-11.68 v76.83,-6.6 76.83,-6.22 76.58,-5.97 EPD_C1.1 76.45,-5.84 74.8,-5.84 EPD_C2.1 74.68,-5.84 73.28,-5.84 EPD_C11.1 73.15,-5.97 72.52,-6.6 | 72.52,-6.6 72.39,-6.73 72.39,-9.14 FH34SRJ-24S-0.5SH_99_.8 | 72.52,-6.6 72.39,-6.6 71.63,-5.84 EPD_C6.1 71.5,-5.84 69.85,-5.84 EPD_C7.1 69.72,-5.84 68.2,-5.84 EPD_C5.1 68.07,-5.97 67.82,-6.22 | 67.82,-6.22 67.82,-9.14 FH34SRJ-24S-0.5SH_99_.17 | 63.37,-9.65 63.37,-7.24 64.64,-5.97 EPD_C9.1 64.77,-5.84 66.29,-5.84 EPD_C8.1 66.42,-5.97 66.67,-6.22 67.82,-6.22 | 63.37,-9.65 63.37,-11.68 FH34SRJ-24S-0.5SH_99_.MP2 | 14.86,25.91 14.86,26.67 U2.29_9 | 14.86,25.91 14.86,25.65 U2.29_8 | U2.29_5 13.59,25.65 13.59,26.67 U2.29_6 | U2.29_5 13.46,25.53 12.32,25.53 U2.29_2 12.32,25.65 12.32,26.67 U2.29_3 12.19,26.8 7.87,31.11 7.87,35.69 U2.28 7.87,35.81 v7.87,36.96 | U2.29_8 14.73,25.53 13.59,25.53 U2.29_5 | U2.29_7 14.73,24.38 13.59,24.38 U2.29_4 13.46,24.38 12.32,24.38 U2.29_1 12.19,24.38 7.87,20.07 7.87,18.41 U2.1 7.87,18.29 7.87,18.03 9.27,16.64 20.95,16.64 28.32,9.27 28.57,9.27 D11.1 28.7,9.27 32.13,9.27 D10.1 32.26,9.27 35.94,9.27 D9.1 36.07,9.4 43.56,16.89 | 36.96,25.91 35.05,25.91 U1.4 34.92,25.91 14.86,25.91
  Top 0.127: 36.96,25.91 38.73,27.69 U1.9 | 36.96,25.91 39.75,23.11 39.75,21.08 D8.1 39.88,20.95 39.88,20.57 43.56,16.89 | 43.56,16.89 44.7,15.75 46.61,15.75 D12.1 46.74,15.62 v46.74,14.48 | 14.86,25.91 U2.29_8 | v59.31,1.91 59.82,1.4 | v7.87,56.13 7.87,56.9
  Bottom 0.127: v143.51,27.05 142.37,28.19 140.72,28.19 131.06,18.54 v129.41,18.54 v129.41,17.27 122.68,10.54 v120.52,10.54 | v46.74,14.48 v59.31,1.91 | v7.87,36.96 v7.87,56.13 | v84.84,10.29 84.84,1.4 v76.83,-6.6
  pour Top: 6.36,18.16 6.34,18.14 6.32,18.12 0.13,18.12 0.08,18.07 0.08,-23.12 59.92,-23.12 59.92,-13.18 59.94,-13.16 59.96,-13.14 59.98,-13.12 78.22,-13.12 78.24,-13.14 78.26,-13.16 78.28,-13.18 78.28,-23.12 170.12,-23.12 170.12,43.92 92.18,43.92 92.16,43.94 92.14,43.96 92.12,43.98 92.12,87.92 0.08,87.92 0.08,36.18 6.32,36.18 6.34,36.16 6.36,36.14 6.38,36.12 6.38,18.18
  pour Bottom: 6.36,18.16 6.34,18.14 6.32,18.12 0.13,18.12 0.08,18.07 0.08,-23.12 59.92,-23.12 59.92,-13.18 59.94,-13.16 59.96,-13.14 59.98,-13.12 78.22,-13.12 78.24,-13.14 78.26,-13.16 78.28,-13.18 78.28,-23.12 170.12,-23.12 170.12,43.92 92.18,43.92 92.16,43.94 92.14,43.96 92.12,43.98 92.12,87.92 0.08,87.92 0.08,36.18 6.32,36.18 6.34,36.16 6.36,36.14 6.38,36.12 6.38,18.18
  pour Bottom: 10.63,3.28 55.07,3.28 56.12,4.33 56.12,37.77 54.77,39.12 8.58,39.12 8.58,5.33
  pour Bottom: 57.16,11.04 57.18,11.02 57.18,-9.97 59.13,-11.92 79.97,-11.92 80.12,-11.77 80.12,8.77 77.37,11.52 56.68,11.52
  pour Top: 124.98,33.37 124.98,-4.32 160.02,-4.32 160.04,-4.34 163.49,-7.78 164.01,-7 163.94,-7.06 163.92,-7.08 163.88,-7.08 163.86,-7.06 163.84,-7.04 163.82,-7.02 163.82,-6.98 163.84,-6.96 164.44,-6.35 164.72,-5.93 164.72,-4.88 164.74,-4.86 166.52,-3.07 166.52,34.17 161.27,39.42 131.03,39.42
  pour Top: 92.46,-8.66 92.48,-8.68 92.48,-8.76 101.7,-8.82 101.72,-8.82 101.72,-8.82 101.72,-8.82 101.73,-8.83 101.74,-8.84 101.74,-8.84 101.74,-8.84 101.75,-8.85 101.76,-8.86 101.76,-8.86 101.76,-8.86 101.77,-8.87 101.78,-8.88 101.78,-8.89 101.78,-8.89 101.78,-8.9 101.78,-8.92 101.78,-8.92 101.78,-8.92 101.77,-8.93 101.76,-8.94 101.76,-8.94 101.76,-8.94 101.75,-8.95 101.74,-8.96 101.74,-8.96 101.74,-8.96 101.73,-8.97 101.72,-8.98 101.71,-8.98 101.71,-8.98 101.7,-8.98 90.48,-8.98 90.48,-9.42 122.27,-9.42 129.02,-2.67 129.02,27.77 123.57,33.22 111.98,33.22 111.96,33.24 109.87,35.32 100.18,35.32 100.16,35.34 80.94,54.56 80.92,54.58 80.92,61.07 77.84,64.16 77.82,64.18 77.82,84.27 76.07,86.02 68.53,86.02 65.74,83.24 65.72,83.22 3.03,83.22 2.78,82.97 2.78,37.78 3.26,38.26 3.28,38.28 5.82,38.28 5.84,38.26 7.96,36.14 7.98,36.12 7.98,33.58 7.96,33.56 7.68,33.27 7.68,16.48 7.66,16.46 4.68,13.47 4.68,-3.97 9.53,-8.82 87.63,-8.82 87.62,-8.82 87.62,-8.81 87.62,-8.81 87.62,-8.8 87.62,-8.78 87.62,-8.78 87.62,-8.78 87.63,-8.77 87.64,-8.76 87.64,-8.76 87.64,-8.76 87.65,-8.75 87.66,-8.74 87.66,-8.74 87.66,-8.74 87.67,-8.73 87.68,-8.72 87.69,-8.72 87.69,-8.72 87.7,-8.72 88.62,-8.72 88.62,-8.68 88.64,-8.66 88.66,-8.64 88.68,-8.62 90.32,-8.62 90.32,-8.48 90.34,-8.46 90.36,-8.44 90.38,-8.42 90.42,-8.42 90.44,-8.44 90.63,-8.62 92.42,-8.62 92.44,-8.64
GPIO8
  Top 0.127: R1.1 12.83,15.24 9.4,15.24 7.11,17.53 7.11,20.19 11.81,24.89 16.64,24.89 19.94,21.59 19.94,19.18 19.18,18.41 U2.10
I2C_PW
  Top 0.127: 163.19,-14.73 161.29,-14.73 SENSOR2.6 | 163.19,-14.73 163.83,-14.1 164.08,-14.1 SENSOR2.2 | 160.02,-14.22 160.78,-13.46 160.91,-13.46 161.16,-13.21 SENSOR2.8 | 160.02,-14.22 160.02,-20.07 R2_PINH.2 160.02,-20.19 160.4,-20.19 161.42,-21.21 C2.1 161.54,-21.21 162.81,-19.94 163.83,-19.94 R1_PINH.2 163.96,-19.94 164.47,-19.94 165.61,-21.08 C1.1 165.74,-21.08 166.37,-20.45 166.37,-19.43 163.19,-16.26 163.19,-14.73 | 160.02,-14.22 157.99,-14.22 137.54,6.22 99.82,6.22 94.74,11.3 88.65,11.3 87.12,9.78 68.71,9.78 47.75,30.73 26.54,30.73 21.84,35.43 21.84,35.69 U2.17
INT_RTC  (via drill 0.3)
  Top 0.127: v16.64,19.43 16.64,18.41 U2.8 | v8.76,10.03 7.11,10.03 TP15.TP | 84.71,36.07 87.76,33.02 87.76,32.26 U3.3 | 84.71,36.07 84.58,36.2 84.58,38.99 84.84,39.24 94.49,39.24 102.11,31.62 102.11,31.37 R1_PINH1.2 | v22.35,17.02 24.13,17.02 v24.26,17.14 | 84.71,36.07 v84.84,36.2
  Bottom 0.127: 16.64,17.91 v16.64,19.43 | v8.76,10.03 16.64,17.91 | 16.64,17.91 21.46,17.91 v22.35,17.02 | v24.26,17.14 24.26,18.41 23.37,19.3 23.37,19.56 40.01,36.2 v84.84,36.2
IO/BOOT  (via drill 0.3)
  Top 0.127: C6.1 44.58,82.93 47.24,82.93 BOOT_BUTTON1.3 47.37,82.93 50.8,82.93 BOOT_BUTTON1.4 50.93,82.8 51.18,82.55 v51.94,82.55 | v52.96,82.55 53.59,83.19 R_BOOT.1 | v24.38,37.34 24.38,35.81 U2.15
  Bottom 0.127: v52.96,82.55 v51.94,82.55 24.38,54.99 v24.38,37.34
IO/CHANGE
  Top 0.127: R_CHANGE.1 69.22,83.95 74.17,78.99 74.17,70.99 73.28,70.1 72.39,70.1 65.79,76.71 65.79,82.55 CHANGE_BUTTON2.4 65.66,82.68 62.36,82.68 CHANGE_BUTTON2.3 62.23,82.55 61.98,82.3 59.82,82.3 C10.1 59.69,82.17 59.69,77.22 55.63,73.15 50.93,73.15 14.22,36.45 14.22,35.81 U2.23
MISO  (via drill 0.3)
  Top 0.127: 7.75,37.47 6.86,36.58 6.86,17.4 20.32,3.94 29.46,3.94 R8.1 | 8,37.47 7.75,37.47 | 8,37.47 9.02,36.45 9.02,35.81 U2.27 9.14,35.69 9.14,35.43 16.13,28.45 34.16,28.45 | 34.16,28.45 34.92,28.45 U1.2 | 34.16,28.45 34.16,26.92 34.42,26.67 35.43,26.67 36.7,27.94 36.7,29.84 37.08,30.23 40.51,30.23 40.77,29.97 40.77,28.07 42.16,26.67 42.93,26.67 48.13,21.46 48.13,15.75 D12.2 | v3.56,59.56 3.56,60.71 J4.P7 | 7.75,37.47 v3.56,41.66 | 8,37.47 24.89,54.36 24.89,64.14 23.11,65.91 23.11,68.96 TP6.TP
  Bottom 0.127: v3.56,41.66 v3.56,59.56
MOSI  (via drill 0.3)
  Top 0.127: 3.05,55.37 15.75,55.37 23.24,62.87 23.24,63.5 TP7.TP | 3.05,55.37 1.91,55.37 0.51,56.77 0.51,60.71 1.78,61.98 5.84,61.98 6.22,61.59 6.22,59.69 6.35,59.56 7.24,59.56 7.75,60.07 7.75,60.71 J4.P3 | v68.33,-10.79 69.34,-9.78 69.34,-9.27 FH34SRJ-24S-0.5SH_99_.14 | v32.89,3.56 32.26,4.19 R7.1 32.13,4.19 31.24,3.3 20.57,3.3 6.6,17.27 6.6,35.94 3.05,39.5 3.05,55.37 | v42.67,20.95 42.67,25.78 U1.5 | v31.37,10.79 28.7,10.79 D11.2 | v15.49,19.94 15.49,18.41 U2.7
  Bottom 0.127: v68.33,-10.79 68.07,-10.79 67.82,-11.05 47.5,-11.05 v32.89,3.56 32.89,10.79 | v42.67,20.95 32.89,11.18 32.89,10.79 | 32.89,10.79 v31.37,10.79 29.59,10.79 20.45,19.94 v15.49,19.94
N$1  (via drill 0.3)
  Top 0.127: v153.29,28.32 R2_USB1.2 | v161.8,29.21 162.18,29.59 162.69,29.59 J2.A5
  Bottom 0.127: v153.29,28.32 156.21,28.32 156.72,27.81 160.4,27.81 v161.8,29.21
N$2
  Top 0.127: R2_USB.1 159,33.4 161.42,33.4 162.18,32.64 162.69,32.64 J2.B5
N$3
  Top 0.127: R_CAPACITOR.2 85.72,19.3 85.09,18.67 84.07,18.67 82.04,20.7 82.04,35.18 81.79,35.43 81.79,36.7 83.31,38.23 D7.1
N$5  (via drill 0.3)
  Top 0.127: v126.24,21.84 125.48,21.84 R1_BAT.2 | v130.94,21.84 131.44,21.84 131.83,22.23 MCP73831.1
  Bottom 0.127: v130.94,21.84 v126.24,21.84
N$8
  Top 0.127: D4.1 94.11,-0.25 96.65,2.29 103.12,2.29 C4.1 103.25,2.29 103.89,1.65 105.03,1.65 105.16,1.78 105.16,2.92 102.11,5.97 99.69,5.97 95,10.67 89.41,10.67 D3.2
N$9
  Top 0.127: CHG_LED.C 135,26.67 120.52,26.67 119.25,25.4 119.25,23.62 121.03,21.84 124.08,21.84 R1_BAT.1
N$10  (via drill 0.3)
  Top 0.127: v124.33,24.13 121.54,24.13 R2_BAT.2 | v127.51,24.13 129.29,22.35 MCP73831.5
  Bottom 0.127: v127.51,24.13 v124.33,24.13
N$11  (via drill 0.3)
  Top 0.127: v63.88,-8.64 63.88,-8.76 64.26,-9.14 FH34SRJ-24S-0.5SH_99_.24 | v54.61,-6.99 53.98,-6.35 EPD_C12.2
  Bottom 0.127: v63.88,-8.64 56.26,-8.64 v54.61,-6.99
N$13
  Top 0.127: FH34SRJ-24S-0.5SH_99_.20 66.42,-9.27 66.42,-9.65 69.34,-12.57 77.34,-12.57 77.6,-12.32 77.6,-4.57 76.2,-3.17 67.82,-3.17 66.42,-4.57 EPD_C8.2
N$14  (via drill 0.3)
  Top 0.127: v64.64,-8.13 65.28,-8.76 65.28,-9.14 FH34SRJ-24S-0.5SH_99_.22 | v58.42,-8.13 57.78,-8.13 57.66,-8.26 EPD_C10.2
  Bottom 0.127: v58.42,-8.13 v64.64,-8.13
N$15  (via drill 0.3)
  Top 0.127: v67.31,-8.38 66.93,-8.76 66.93,-9.14 FH34SRJ-24S-0.5SH_99_.19 | v69.09,-5.21 69.72,-4.57 EPD_C7.2
  Bottom 0.127: v67.31,-8.38 68.2,-8.38 69.09,-7.49 v69.09,-5.21
N$16  (via drill 0.3)
  Top 0.127: v67.44,-10.03 67.44,-9.27 FH34SRJ-24S-0.5SH_99_.18 | v70.87,-5.21 71.5,-4.57 EPD_C6.2
  Bottom 0.127: v67.44,-10.03 67.44,-9.53 70.87,-6.1 v70.87,-5.21
N$17
  Top 0.127: FH34SRJ-24S-0.5SH_99_.5 73.91,-9.27 73.91,-9.65 76.58,-12.32 77.22,-12.32 77.34,-12.19 77.34,-5.59 76.96,-5.21 75.31,-5.21 74.8,-4.7 EPD_C2.2
N$18  (via drill 0.3)
  Top 0.127: v74.3,-6.6 74.3,-9.14 FH34SRJ-24S-0.5SH_99_.4 | v75.56,-4.7 76.45,-4.7 EPD_C1.2
  Bottom 0.127: v74.3,-6.6 74.3,-5.97 v75.56,-4.7
N$19
  Top 0.127: C_DELAY.2 55.37,75.56 51.56,75.56 IC1.5
N$20
  Top 0.127: 124.59,11.81 125.09,11.81 125.22,11.94 IC4.3 | 124.59,11.81 124.33,11.81 | 124.33,11.81 123.06,11.81 D2.1 | 124.33,11.81 124.33,9.02 C1_BAT1.1 | 124.59,11.81 124.59,13.34 124.84,13.59 124.97,13.59 125.22,13.84 IC4.1
PREVGH
  Top 0.127: 77.85,-4.45 77.85,-12.45 77.47,-12.83 69.09,-12.83 65.91,-9.65 65.91,-9.27 FH34SRJ-24S-0.5SH_99_.21 | 77.85,-4.45 76.33,-2.92 66.42,-2.92 64.77,-4.57 EPD_C9.2 | 77.85,-4.45 78.11,-4.19 88.14,-4.19 94.36,2.03 94.36,5.71 D5.1
PREVGL  (via drill 0.3)
  Top 0.127: 78.36,-13.08 84.84,-13.08 97.54,-0.38 D4.2 | 78.36,-13.08 68.33,-13.08 64.9,-9.65 64.9,-9.27 FH34SRJ-24S-0.5SH_99_.23 | v74.04,-3.94 73.53,-4.45 73.28,-4.45 EPD_C11.2 | 78.36,-13.08 v78.36,-8.13
  Bottom 0.127: v74.04,-3.94 75.44,-3.94 76.33,-4.83 76.33,-6.99 77.47,-8.13 v78.36,-8.13
RESE  (via drill 0.3)
  Top 0.127: v74.8,-8.13 74.8,-9.14 FH34SRJ-24S-0.5SH_99_.3 | v62.74,2.41 57.78,2.41 57.28,2.92 R3.2 57.15,2.92 54.86,0.64 54.86,-1.4 Q3.2
  Bottom 0.127: v74.8,-8.13 74.42,-8.13 63.88,2.41 v62.74,2.41
RESE'
  Top 0.127: R3.1 57.28,1.65 58.04,0.89 58.04,-1.91 R2.2 58.04,-2.03 57.15,-2.03 53.34,-5.84 53.34,-6.86 53.59,-7.11 53.59,-8.51 SJ1.2
RESET  (via drill 0.3)
  Top 0.127: C5.1 18.8,84.33 20.7,84.33 21.46,83.57 24.89,83.57 25.65,84.33 RESET_BUTTON.4 25.78,84.33 v26.8,85.34 | v27.81,85.34 28.7,85.34 R_RESET.1 | v41.78,82.55 48.64,75.69 IC1.1 | v10.29,21.84 10.29,18.41 U2.3
  Bottom 0.127: v41.78,82.55 30.61,82.55 v27.81,85.34 v26.8,85.34 18.54,85.34 9.53,76.33 9.53,34.8 10.29,34.04 v10.29,21.84
RTC_RST  (via drill 0.3)
  Top 0.127: v44.58,33.66 24.89,33.66 23.11,35.43 23.11,35.69 U2.16 | v85.47,33.66 86.49,32.64 86.49,32.26 U3.4
  Bottom 0.127: v85.47,33.66 v44.58,33.66
RX  (via drill 0.3)
  Top 0.127: v46.1,69.22 12.95,36.07 12.95,35.81 U2.24 | v84.58,69.22 85.98,70.61 TP2.TP
  Bottom 0.127: v84.58,69.22 v46.1,69.22
SCK  (via drill 0.3)
  Top 0.127: J4.P5 5.59,60.83 5.21,61.21 5.21,61.34 4.83,61.72 1.91,61.72 0.76,60.58 0.76,56.9 2.03,55.63 15.62,55.63 22.1,62.1 22.1,64.14 22.86,64.9 23.75,64.9 24.64,64.01 24.64,58.8 23.37,57.53 TP8.TP 23.37,57.4 v23.37,53.47 | v69.22,-10.54 69.85,-9.91 69.85,-9.27 FH34SRJ-24S-0.5SH_99_.13 | v36.7,3.17 36.07,3.81 R6.1 | v39.24,5.71 39.5,5.71 49.02,15.24 49.02,20.95 42.93,27.05 42.8,27.05 U1.6 | v34.67,9.78 33.66,10.79 32.26,10.79 D10.2 32.13,10.92 31.37,11.68 v28.07,11.68 | 18.41,20.45 15.37,20.45 14.22,19.3 14.22,18.41 U2.6 | v19.43,19.43 18.41,20.45 | 18.41,20.45 v19.18,21.21
  Bottom 0.127: v69.22,-10.54 68.71,-10.54 68.45,-10.29 68.2,-10.29 67.69,-10.79 50.67,-10.79 v36.7,3.17 38.99,5.46 | 38.99,5.46 v39.24,5.71 | 38.99,5.46 v34.67,9.78 | v19.43,19.43 20.57,19.43 28.07,11.94 v28.07,11.68 | v23.37,53.47 23.37,40.26 24.13,39.5 24.13,37.72 19.18,32.77 v19.18,21.21
SCL  (via drill 0.3)
  Top 0.127: v159.26,-20.83 159.89,-21.46 R2_PINH.1 | v163.83,-16.26 163.83,-15.88 164.08,-15.62 SENSOR2.4 | v140.59,25.4 142.11,25.4 142.37,25.65 142.37,26.54 142.11,26.8 141.86,26.8 U4.7 | 164.85,-2.03 165.48,-2.67 J3.4 | 164.85,-2.03 v140.59,22.23 | v163.83,-3.17 164.85,-2.16 164.85,-2.03 | v36.07,30.23 23.24,30.23 18.03,35.43 18.03,35.69 U2.20 | v89.28,24.38 90.3,23.37 90.3,22.99 U3.16
  Bottom 0.127: v159.26,-20.83 v163.83,-16.26 v163.83,-3.17 | v140.59,25.4 v140.59,22.23 135.13,22.23 122.94,10.03 103.63,10.03 v89.28,24.38 83.44,30.23 v36.07,30.23
SDA  (via drill 0.3)
  Top 0.127: 164.47,-14.86 166.62,-17.02 166.62,-21.34 166.24,-21.72 165.1,-21.72 164.59,-21.21 163.96,-21.21 R1_PINH.1 | 164.47,-14.86 164.21,-14.86 SENSOR2.3 164.47,-14.86 | v141.1,27.69 141.35,27.43 141.73,27.43 U4.8 | v164.47,-3.17 164.72,-3.17 165.23,-3.68 165.48,-3.68 J3.3 | v165.1,-14.22 164.47,-14.86 | 89.03,22.61 88.14,21.72 87.38,21.72 87.25,21.84 87.25,23.88 86.87,24.26 86.23,24.26 85.98,24 85.98,21.84 86.49,21.34 86.49,18.8 86.11,18.41 60.45,18.41 41.02,37.85 20.45,37.85 19.3,36.7 19.3,35.81 U2.19 | 89.03,22.61 89.03,22.86 U3.15 89.03,22.61 | v91.69,22.73 90.68,21.72 89.92,21.72 89.03,22.61
  Bottom 0.127: 141.1,26.54 141.1,20.19 v164.47,-3.17 165.1,-3.81 v165.1,-14.22 | 141.1,26.54 v141.1,27.69 | 141.1,26.54 143.64,26.54 144.02,26.92 144.02,27.18 142.75,28.45 97.41,28.45 v91.69,22.73
SRC
  Top 0.127: C4.2 104.52,2.41 104.27,2.41 100.97,5.71 97.92,5.71 D5.2 97.79,5.84 95.63,5.84 95,6.48 90.81,6.48 87,2.67 L1.1 86.87,2.67 85.72,3.81 55.75,3.81 52.96,1.02 52.96,-2.03 53.21,-2.29 53.72,-2.29 53.98,-2.03 53.98,0.64 Q3.3
SS_SD  (via drill 0.3)
  Top 0.127: v5.84,76.83 5.84,79.76 R10.1 | v8.26,61.85 8.89,61.21 J4.P2 | v40.89,20.19 41.27,20.57 41.27,20.95 D8.2 | v13.21,20.45 11.68,18.92 11.68,18.41 U2.4
  Bottom 0.127: v5.84,76.83 5.84,64.26 v8.26,61.85 8.26,56.39 9.27,55.37 9.27,22.23 11.05,20.45 v13.21,20.45 20.32,20.45 24.13,16.64 24.38,16.64 27.94,20.19 v40.89,20.19
TX  (via drill 0.3)
  Top 0.127: v45.34,69.72 11.68,36.07 11.68,35.81 U2.25 | v78.36,69.72 79.25,70.61 TP1.TP
  Bottom 0.127: v78.36,69.72 v45.34,69.72
USB_D+  (via drill 0.3)
  Top 0.127: v143.51,31.11 155.45,31.11 D1.1 | v24.38,19.94 24.38,18.41 U2.14
  Bottom 0.127: v143.51,31.11 35.56,31.11 v24.38,19.94
USB_D-  (via drill 0.3)
  Top 0.127: v154.31,29.34 155.45,29.34 D1.3 | v23.88,19.43 23.11,18.67 23.11,18.41 U2.13
  Bottom 0.127: v154.31,29.34 84.71,29.34 83.31,30.73 35.81,30.73 24.51,19.43 v23.88,19.43
VBAT
  Top 0.127: C2_BAT.1 128.14,19.3 128.14,19.05 129.16,18.03 135,18.03 138.81,21.84 Q1.3 138.94,21.97 142.11,25.15 142.24,25.15 142.62,25.53 142.62,27.3 141.73,28.19 139.19,28.19 | MCP73831.3 131.95,24.26 135.25,24.26 137.29,26.29 139.7,26.29 U4.3 139.83,26.42 139.83,26.8 U4.2 139.7,26.92 139.45,26.92 139.19,27.18 139.19,28.19 | 139.19,28.19 139.19,31.11 144.4,36.32 144.4,39.88 TP3.TP
VBUS  (via drill 0.3)
  Top 0.127: 156.21,25.4 156.21,26.54 156.34,26.67 C4_USB.1 156.46,26.8 156.97,27.3 v156.97,28.32 | 156.21,25.4 156.21,24.26 C5_USB.1 156.21,24.13 159,21.34 159,20.7 PFMF.050.1.2 | v156.97,29.72 157.35,30.1 157.99,30.1 D1.5 | CHG_LED.A 135,25.15 130.3,25.15 129.41,24.26 MCP73831.4 129.29,24.26 128.02,24.26 127.13,25.15 119.89,25.15 119.51,24.77 119.51,23.75 119.76,23.5 125.22,23.5 | D2.2 122.94,13.72 122.94,12.83 122.3,12.19 122.3,9.78 123.83,8.26 127.76,8.26 131.06,11.56 135.13,11.56 136.53,10.16 138.05,10.16 138.3,10.41 138.3,11.43 137.67,12.06 R1_PWRUSB.2 137.67,12.19 137.79,12.32 137.79,17.78 | 137.79,17.78 137.79,19.68 Q1.1 137.92,19.81 139.57,21.46 139.57,21.84 142.88,25.15 142.88,25.4 | 125.22,23.5 125.22,24 C1_BAT.1 | 125.22,23.5 127.51,21.21 127.51,18.8 128.52,17.78 137.79,17.78 | 142.88,25.4 142.88,31.11 144.78,33.02 144.78,34.8 TP14.TP | 142.88,25.4 156.21,25.4
  Bottom 0.127: v156.97,28.32 v156.97,29.72
VRTC
  Top 0.127: 87.76,23.75 86.11,25.4 | 86.11,25.4 83.44,28.07 83.44,33.15 82.55,34.04 82.55,35.81 C8.1 | 87.76,23.75 87.76,22.99 U3.14 87.76,23.75 | 86.11,25.4 84.58,23.88 84.58,19.43 R_CAPACITOR.1 | 87.76,23.75 90.3,26.29 95.38,26.29 C10_SUPERCAP.2
VUSB  (via drill 0.3)
  Top 0.127: J2.A9 162.81,33.4 162.81,33.15 J2.B4 162.81,33.02 163.45,33.02 163.83,32.64 163.83,29.08 163.45,28.7 162.81,28.7 J2.B9 162.81,28.57 162.81,28.32 J2.A4 162.69,28.19 v161.8,28.19 | v155.83,22.23 155.83,21.84 154.69,20.7 PFMF.050.1.1
  Bottom 0.127: v155.83,22.23 v161.8,28.19

## Text on the board
Measures: 3V3 | GND | TX | RX | GND | EPD_3V3_C | VBAT | EPD_RST | VBUS | INT_RTC | EPD_DC | EPD_3V3